# EAGLE board Doppler_LED_Controller-Panel (EAGLE 9.1.3), part 1 of 3
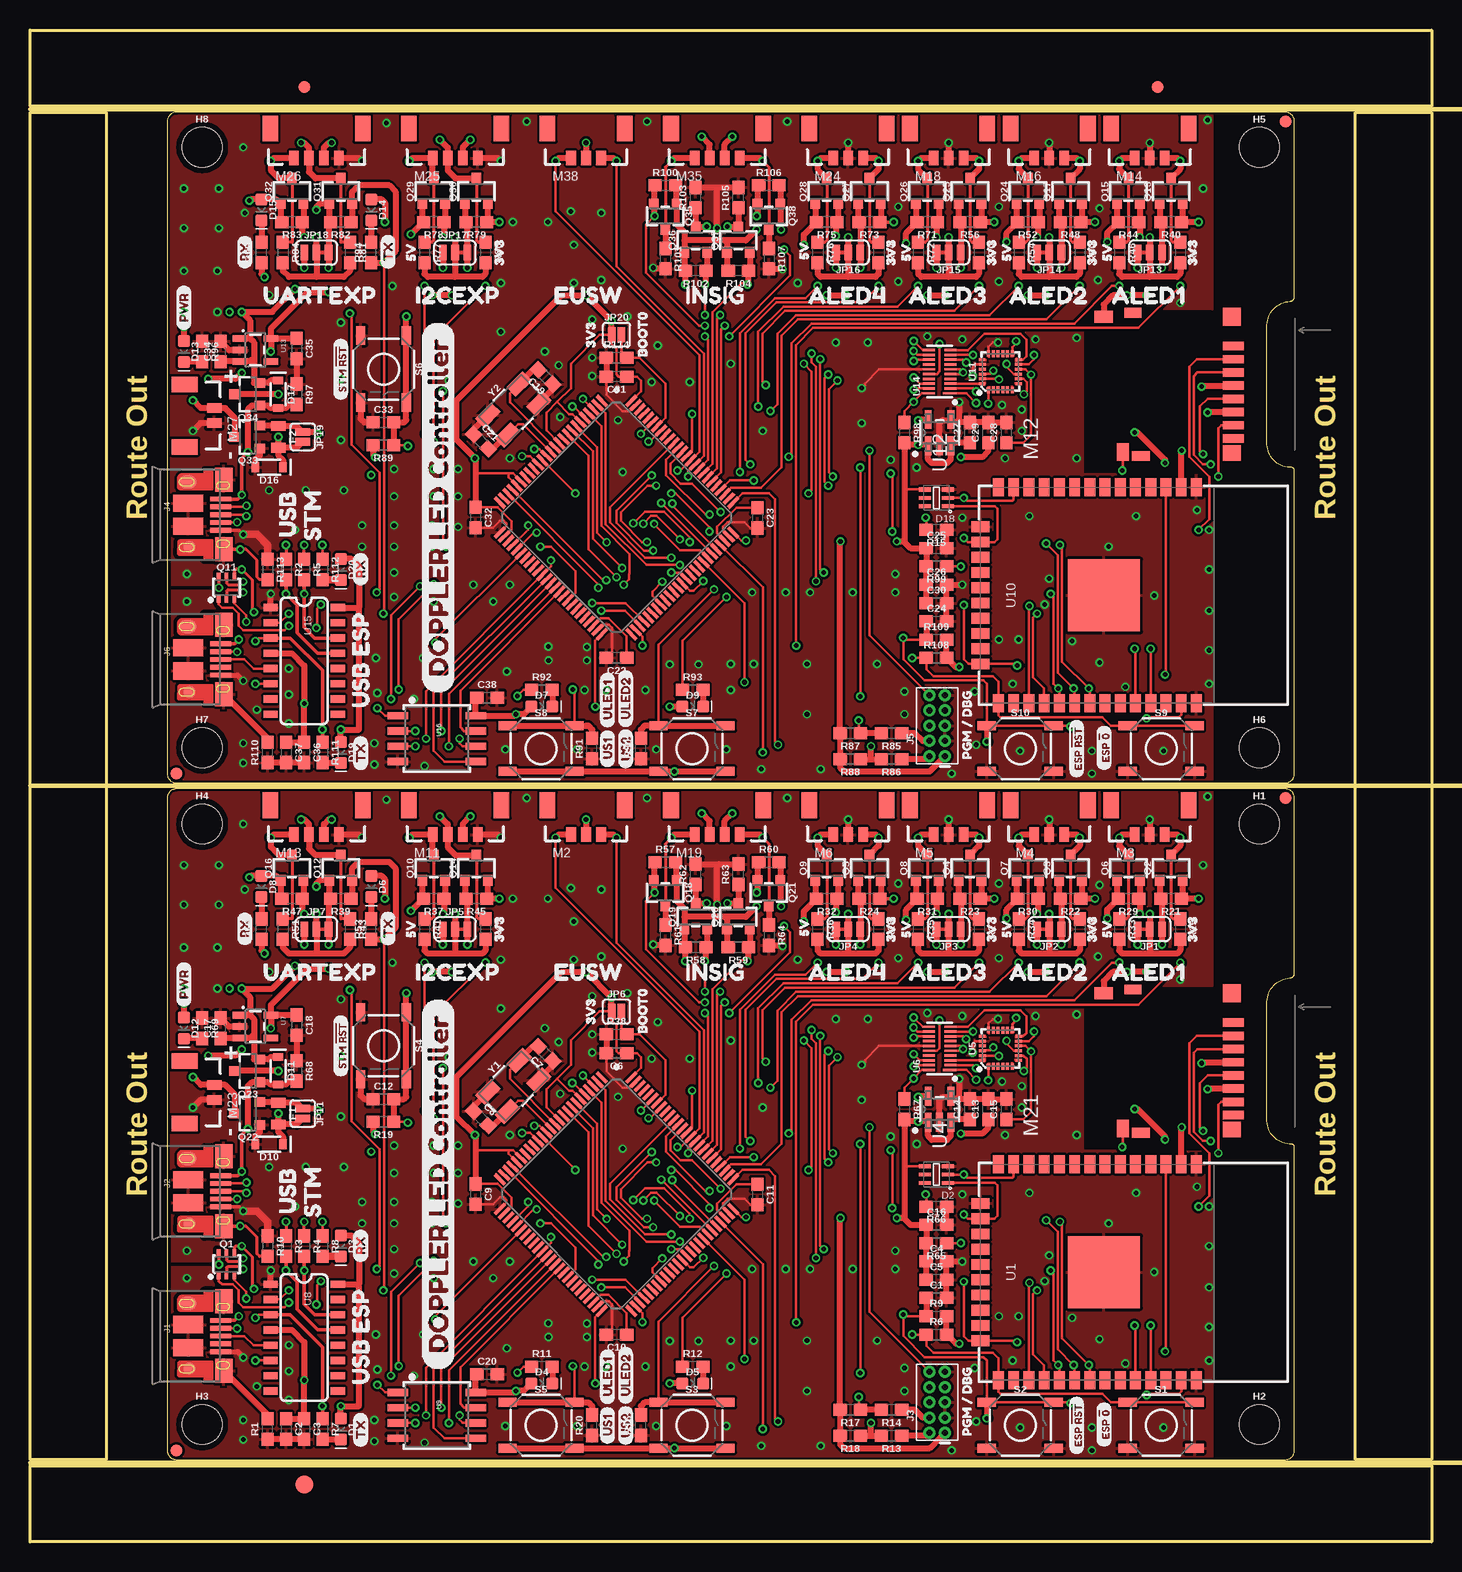
[diagram p0: board, top side]
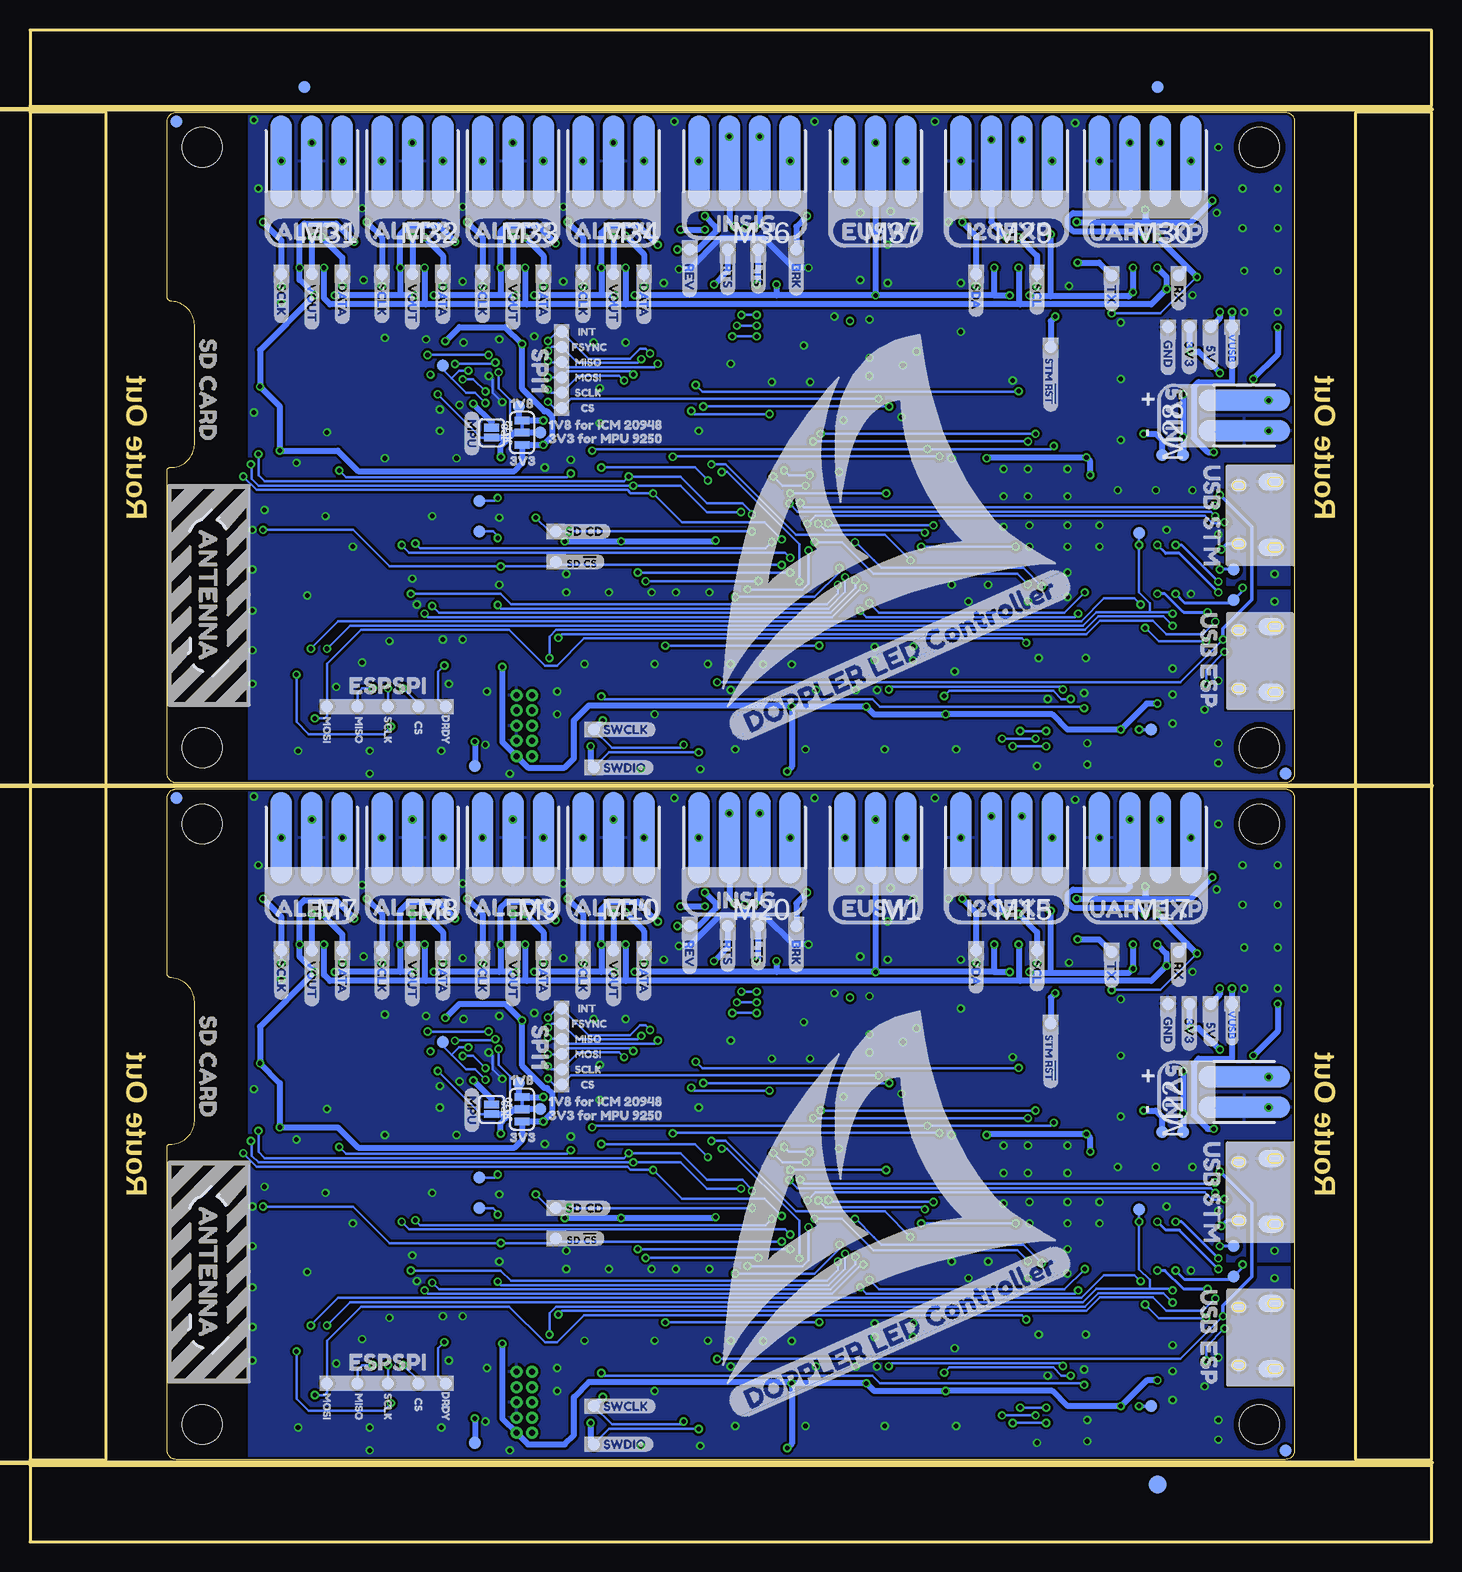
[diagram p1: board, bottom side, seen from below]

Size 116.84 x 125.98 mm. Coordinates in mm from the lower left corner, seen from the top.
Outline: 12.19,6.86 104.65,6.86 arc90 105.41,7.62 105.41,32.89 arc90 105.16,33.15 arc-90 103.12,35.05 103.12,44.83 arc-90 105.03,46.99 arc90 105.41,47.37 105.41,61.98 arc90 104.65,62.74 12.19,62.74 arc90 11.43,61.98 11.43,7.62 arc90 12.19,6.86
Outline: 12.19,63.25 104.65,63.25 arc90 105.41,64.01 105.41,89.28 arc90 105.16,89.54 arc-90 103.12,91.44 103.12,101.22 arc-90 105.03,103.38 arc90 105.41,103.76 105.41,118.36 arc90 104.65,119.13 12.19,119.13 arc90 11.43,118.36 11.43,64.01 arc90 12.19,63.25
Outline: 0,6.35 116.84,6.35 116.84,0 0,0 0,6.35
Outline: 110.49,119.13 116.84,119.13 116.84,6.86 110.49,6.86 110.49,119.13
Outline: 0,125.98 116.84,125.98 116.84,119.63 0,119.63 0,125.98
Outline: 0,119.13 6.35,119.13 6.35,6.86 0,6.86 0,119.13
Copper layers (1*16): Top 0.035mm / dielectric 1.5mm / Bottom 0.035mm
Design rules "SparkFun-2-layer-PCBWay-LIMIT": minimum track width 6mil, minimum drill 0.3mm, track to track 6mil, track to pad 6mil, pad to pad 6mil, via to via 6mil, smd to smd 6mil, copper to edge 6mil, drill to drill 6mil, minimum pad ring 6mil, minimum via ring 6mil, stop-mask expansion 4mil, vias tented up to drill 25mil, thermal gap 10mil
Milling: 3 lines

## Footprints (pad centres in the part's own frame; a part is rotated, then mirrored left to right if it is on the bottom)
0603 = smd 1.1 x 1: 1 -0.85,0; 2 0.85,0
LED-0603 = smd 1 x 1: A -0.877,0; C 0.877,0
APA102_2020_LONG = smd 1 x 0.3: 1DIN -0.95,0.7; 2CIN -0.95,0; 5COUT 0.95,0; 6DOUT 0.95,0.7 | smd 1 x 0.35: 3GND -0.95,-0.7; 4VCC 0.95,-0.7
SOD-323 = smd 0.63 x 0.83: A 1.15,0; C -1.15,0
FIDUCIAL-1X2 = smd 1 x 1: 1 0,0
FIDUCIAL-1.5X3 = smd 1.5 x 1.5: 1 0,0
0805 = smd 0.8 x 1.2: 1 -0.9,0; 2 0.9,0
STAND-OFF = hole 3.302: 0,0
USB-MICROB-PTH-MILL = smd 0.4 x 1.75: D+ 0,0; D- -0.65,0; GND 1.3,0; ID 0.65,0; VBUS -1.3,0 | smd 2 x 1.46: SHIELD -2.9,0.275; SHIELD2 2.9,0.275 | smd 1.425 x 2.5: SHIELD3 -0.963,-2.675; SHIELD4 0.963,-2.675 | smd 1.4 x 2.1 bottom: SHIELD5 -2.731,-2.531; SHIELD7 2.729,-2.531 | smd 1 x 1: SHIELD6 2.7,-2.575 | smd 1.1 x 1.5: SHIELD8 -2.731,-2.731 | smd 1 x 1.3 bottom: SHIELD9 -2.43,0.195; SHIELD10 2.43,0.195
2X5-PTH-1.27MM = drill 0.508 pad 1: 1 -2.54,-0.635; 2 -2.54,0.635; 3 -1.27,-0.635; 4 -1.27,0.635; 5 0,-0.635; 6 0,0.635; 7 1.27,-0.635; 8 1.27,0.635; 9 2.54,-0.635; 10 2.54,0.635
SMT-JUMPER_3_1-NC_TRACE_SILK = smd 0.635 x 1.27: 1 -1.016,0; 2 0,0; 3 1.016,0
SMT-JUMPER_2_NO_SILK = smd 0.635 x 1.27: 1 -0.406,0; 2 0.406,0
1X03_SMD_0.1IN = smd 1.778 x 7.62: P$1 -2.54,0; P$2 0,0; P$3 2.54,0
3_PIN_LOCK = smd 1.3 x 2.15: MOUNT0 -3.225,2.46; MOUNT1 3.225,2.46 | smd 0.8 x 1.2: P$1 -1.25,0; P$2 0,0; P$3 1.25,0
4_PIN_LOCK = smd 1.3 x 2.15: MOUNT0 -4.475,2.46; MOUNT1 3.225,2.46 | smd 0.8 x 1.2: P$1 -2.5,0; P$2 -1.25,0; P$3 0,0; P$4 1.25,0
SD_AMPHENOL_PUSH_PULL = smd 1.45 x 1: CD_SW1 -1.125,8.35 | smd 1 x 1.55: CD_SW2 10.15,9.925 | smd 1.3 x 1.5: NC_MOUNT1 -1.2,-0.75 | smd 1.5 x 1.5: NC_MOUNT2 10.15,-0.75 | smd 0.8 x 1.5: NC_MOUNT3 -1.475,6.85 | smd 0.8 x 1.4: NC_MOUNT4 10.475,7.5 | smd 0.7 x 1.75: P$1 7.7,-0.875; P$2 6.6,-0.875; P$3 5.5,-0.875; P$4 4.4,-0.875; P$5 3.3,-0.875; P$6 2.2,-0.875; P$7 1.1,-0.875; P$8 0,-0.875
1X04_SMD_0.1IN = smd 1.778 x 7.62: P$1 -3.81,0; P$2 -1.27,0; P$3 1.27,0; P$4 3.81,0
1X02_SMD_0.1IN = smd 1.778 x 7.62: P$1 -1.27,0; P$2 1.27,0
2_PIN_LOCK = smd 1.3 x 2.15: MOUNT0 -1.975,2.46; MOUNT1 3.225,2.46 | smd 0.8 x 1.2: P$2 0,0; P$3 1.25,0
SC70-6 = smd 0.3 x 0.66: 1 -0.65,-0.92; 2 0,-0.92; 3 0.65,-0.92; 4 0.65,0.92; 5 0,0.92; 6 -0.65,0.92
SOT23-3 = smd 0.8 x 0.9: 1 -0.95,-1; 2 0.95,-1; 3 0,1.1
TACTILE_SWITCH_SMD_5.2MM = smd 1.524 x 0.762: 1 -2.794,1.905; 2 2.794,1.905; 3 -2.794,-1.905; 4 2.794,-1.905
PAD.03X.04 = smd 1.016 x 1.016: P$1 0,0
ESP-WROOM-32 = smd 0.9 x 1.5: 1 7.7,9; 2 6.43,9; 3 5.16,9; 4 3.89,9; 5 2.62,9; 6 1.35,9; 7 0.08,9; 8 -1.19,9; 9 -2.46,9; 10 -3.73,9; 11 -5,9; 12 -6.27,9; 13 -7.54,9; 14 -8.81,9; 25 -8.81,-9; 26 -7.54,-9; 27 -6.27,-9; 28 -5,-9; 29 -3.73,-9; 30 -2.46,-9; 31 -1.19,-9; 32 0.08,-9; 33 1.35,-9; 34 2.62,-9; 35 3.89,-9; 36 5.16,-9; 37 6.43,-9; 38 7.7,-9 | smd 1.5 x 0.9: 15 -10.3,5.715; 16 -10.3,4.445; 17 -10.3,3.175; 18 -10.3,1.905; 19 -10.3,0.635; 20 -10.3,-0.635; 21 -10.3,-1.905; 22 -10.3,-3.175; 23 -10.3,-4.445; 24 -10.3,-5.715 | smd 6 x 6: GND 0,0
LQFP-100 = smd 0.3 x 1.2: P$1 -6,-7.75; P$2 -5.5,-7.75; P$3 -5,-7.75; P$4 -4.5,-7.75; P$5 -4,-7.75; P$6 -3.5,-7.75; P$7 -3,-7.75; P$8 -2.5,-7.75; P$9 -2,-7.75; P$10 -1.5,-7.75; P$11 -1,-7.75; P$12 -0.5,-7.75; P$13 0,-7.75; P$14 0.5,-7.75; P$15 1,-7.75; P$16 1.5,-7.75; P$17 2,-7.75; P$18 2.5,-7.75; P$19 3,-7.75; P$20 3.5,-7.75; P$21 4,-7.75; P$22 4.5,-7.75; P$23 5,-7.75; P$24 5.5,-7.75; P$25 6,-7.75; P$51 6,7.75; P$52 5.5,7.75; P$53 5,7.75; P$54 4.5,7.75; P$55 4,7.75; P$56 3.5,7.75; P$57 3,7.75; P$58 2.5,7.75; P$59 2,7.75; P$60 1.5,7.75; P$61 1,7.75; P$62 0.5,7.75; P$63 0,7.75; P$64 -0.5,7.75; P$65 -1,7.75; P$66 -1.5,7.75; P$67 -2,7.75; P$68 -2.5,7.75; P$69 -3,7.75; P$70 -3.5,7.75; P$71 -4,7.75; P$72 -4.5,7.75; P$73 -5,7.75; P$74 -5.5,7.75; P$75 -6,7.75 | smd 1.2 x 0.3: P$26 7.75,-6; P$27 7.75,-5.5; P$28 7.75,-5; P$29 7.75,-4.5; P$30 7.75,-4; P$31 7.75,-3.5; P$32 7.75,-3; P$33 7.75,-2.5; P$34 7.75,-2; P$35 7.75,-1.5; P$36 7.75,-1; P$37 7.75,-0.5; P$38 7.75,0; P$39 7.75,0.5; P$40 7.75,1; P$41 7.75,1.5; P$42 7.75,2; P$43 7.75,2.5; P$44 7.75,3; P$45 7.75,3.5; P$46 7.75,4; P$47 7.75,4.5; P$48 7.75,5; P$49 7.75,5.5; P$50 7.75,6; P$76 -7.75,6; P$77 -7.75,5.5; P$78 -7.75,5; P$79 -7.75,4.5; P$80 -7.75,4; P$81 -7.75,3.5; P$82 -7.75,3; P$83 -7.75,2.5; P$84 -7.75,2; P$85 -7.75,1.5; P$86 -7.75,1; P$87 -7.75,0.5; P$88 -7.75,0; P$89 -7.75,-0.5; P$90 -7.75,-1; P$91 -7.75,-1.5; P$92 -7.75,-2; P$93 -7.75,-2.5; P$94 -7.75,-3; P$95 -7.75,-3.5; P$96 -7.75,-4; P$97 -7.75,-4.5; P$98 -7.75,-5; P$99 -7.75,-5.5; P$100 -7.75,-6
DDC5 = smd 1.575 x 0.559: 1 -1.092,0.95; 2 -1.092,0; 3 -1.092,-0.95; 4 1.092,-0.95; 5 1.092,0.95
QFN24-3X3 = smd 0.495 x 0.25: 1 -1.552,1; 6 -1.552,-1; 13 1.552,-1; 18 1.552,1 | smd 0.6 x 0.25: 2 -1.5,0.6; 3 -1.5,0.2; 4 -1.5,-0.2; 5 -1.5,-0.6; 14 1.5,-0.6; 15 1.5,-0.2; 16 1.5,0.2; 17 1.5,0.6 | smd 0.25 x 0.495: 7 -1,-1.552; 12 1,-1.552; 19 1,1.552; 24 -1,1.552 | smd 0.25 x 0.6: 8 -0.6,-1.5; 9 -0.2,-1.5; 10 0.2,-1.5; 11 0.6,-1.5; 20 0.6,1.5; 21 0.2,1.5; 22 -0.2,1.5; 23 -0.6,1.5
UFDFN-20 = smd 0.2 x 1.1: 1 -1.8,-0.85 | smd 0.2 x 1: 2 -1.4,-0.9; 3 -1,-0.9; 4 -0.6,-0.9; 5 -0.2,-0.9; 6 0.2,-0.9; 7 0.6,-0.9; 8 1,-0.9; 9 1.4,-0.9; 10 1.8,-0.9; 11 1.8,0.9; 12 1.4,0.9; 13 1,0.9; 14 0.6,0.9; 15 0.2,0.9; 16 -0.2,0.9; 17 -0.6,0.9; 18 -1,0.9; 19 -1.4,0.9; 20 -1.8,0.9
SOT23-5 = smd 0.55 x 1.2: 1 -0.95,-1.3; 2 0,-1.3; 3 0.95,-1.3; 4 0.95,1.3; 5 -0.95,1.3
SO016 = smd 0.6 x 1.2: 1 -4.445,-2.8; 2 -3.175,-2.8; 3 -1.905,-2.8; 4 -0.635,-2.8; 5 0.635,-2.8; 6 1.905,-2.8; 7 3.175,-2.8; 8 4.445,-2.8; 9 4.445,2.8; 10 3.175,2.8; 11 1.905,2.8; 12 0.635,2.8; 13 -0.635,2.8; 14 -1.905,2.8; 15 -3.175,2.8; 16 -4.445,2.8
SOIC-8 = smd 0.61 x 1.702: 1 -1.905,-3.251; 2 -0.635,-3.251; 3 0.635,-3.251; 4 1.905,-3.251; 5 1.905,3.251; 6 0.635,3.251; 7 -0.635,3.251; 8 -1.905,3.251
CRYSTAL-SMD-5X3.2-4PAD = smd 1.9 x 1.1: 1 -1.85,-1.15; 2 1.85,-1.15; 3 1.85,1.15; 4 -1.85,1.15

## Placement (x,y rotation side)
C1  0.1uF  [0603]  75.56,20.32 0 top
C2  2.2uF  [0603]  21.34,9.4 270 top
C3  0.1uF  [0603]  22.86,9.4 270 top
C4  0.1uF  [0603]  75.56,23.37 0 top
C5  10uF  [0603]  75.56,21.84 0 top
C6  0.1uF  [0603]  48.9,40.72 180 top
C7  18pF  [0603]  42.98,40.68 135 top
C8  18pF  [0603]  37.59,35.29 315 top
C9  10uF  [0603]  37.15,28.97 270 top
C10  2.2uF  [0603]  48.9,17.27 180 top
C11  2.2uF  [0603]  60.64,28.94 270 top
C12  0.1uF  [0603]  29.46,36.89 0 top
C13  0.1uF  [0603]  79.88,36.04 90 top
C14  0.1uF  [0603]  78.36,36.04 90 top
C15  0.1uF  [0603]  81.41,36.04 90 top
C16  0.1uF  [0603]  75.56,26.42 0 top
C17  2.2uF  [0603]  15.88,42.8 90 top
C18  2.2uF  [0603]  22.23,43.05 270 top
C19  18pF  [0603]  42.98,97.07 135 top
C20  0.1uF  [0603]  38.1,13.97 0 top
C21  18pF  [0603]  37.59,91.68 315 top
C22  2.2uF  [0603]  48.9,73.66 180 top
C23  2.2uF  [0603]  60.64,85.33 270 top
C24  0.1uF  [0603]  75.56,76.71 0 top
C25  0.1uF  [0603]  75.56,82.8 0 top
C26  0.1uF  [0603]  75.56,79.76 0 top
C27  0.1uF  [0603]  78.36,92.43 90 top
C28  0.1uF  [0603]  81.41,92.43 90 top
C29  0.1uF  [0603]  79.88,92.43 90 top
C30  10uF  [0603]  75.56,78.23 0 top
C31  0.1uF  [0603]  48.9,97.1 180 top
C32  10uF  [0603]  37.15,85.36 270 top
C33  0.1uF  [0603]  29.46,93.28 0 top
C34  2.2uF  [0603]  15.88,99.19 90 top
C35  2.2uF  [0603]  22.23,99.44 270 top
C36  0.1uF  [0603]  22.86,65.79 270 top
C37  2.2uF  [0603]  21.34,65.79 270 top
C38  0.1uF  [0603]  38.1,70.36 0 top
D1  ESPTX-GREEN  [LED-0603]  25.91,9.4 270 top
D2  ESP_STAT  [APA102_2020_LONG]  75.56,30.61 180 top
D3  ESPRX-YELLOW  [LED-0603]  25.91,24.64 270 top
D4  ULED1-BLUE  [LED-0603]  42.67,13.21 0 top
D5  ULED2-WHITE  [LED-0603]  55.24,13.21 0 top
D6  U7TX-GREEN  [LED-0603]  28.45,54.61 270 top
D7  ULED1-BLUE  [LED-0603]  42.67,69.6 0 top
D8  U7RX-YELLOW  [LED-0603]  19.3,54.61 270 top
D9  ULED2-WHITE  [LED-0603]  55.24,69.6 0 top
D10  5.6V  [SOD-323]  19.94,33.15 180 top
D11  3A/10V/280mV  [SOD-323]  20.7,39.24 270 top
D12  PWR-RED  [LED-0603]  12.83,42.8 270 top
D13  PWR-RED  [LED-0603]  12.83,99.19 270 top
D14  U7TX-GREEN  [LED-0603]  28.45,111 270 top
D15  U7RX-YELLOW  [LED-0603]  19.3,111 270 top
D16  5.6V  [SOD-323]  19.94,89.54 180 top
D17  3A/10V/280mV  [SOD-323]  20.7,95.63 270 top
D18  ESP_STAT  [APA102_2020_LONG]  75.56,87 180 top
D19  ESPTX-GREEN  [LED-0603]  25.91,65.79 270 top
D20  ESPRX-YELLOW  [LED-0603]  25.91,81.03 270 top
E$1  [FIDUCIAL-1X2]  22.86,121.22 0 top
E$2  [FIDUCIAL-1X2]  22.86,121.22 0 bottom
E$3  [FIDUCIAL-1X2]  93.98,121.22 0 top
E$4  [FIDUCIAL-1X2]  93.98,121.22 0 bottom
E$5  [FIDUCIAL-1.5X3]  22.86,4.76 0 top
E$6  [FIDUCIAL-1.5X3]  22.86,4.76 0 bottom
F1  PPTC_6V500MA  [0805]  20.7,35.69 270 top
F2  PPTC_6V500MA  [0805]  20.7,92.08 270 top
FD1  FIDUCIAL1X2  [FIDUCIAL-1X2]  12.19,7.62 0 top
FD2  FIDUCIAL1X2  [FIDUCIAL-1X2]  104.65,61.98 0 top
FD3  FIDUCIAL1X2  [FIDUCIAL-1X2]  12.19,7.62 0 bottom
FD4  FIDUCIAL1X2  [FIDUCIAL-1X2]  104.65,61.98 0 bottom
FD5  FIDUCIAL1X2  [FIDUCIAL-1X2]  12.19,64.01 0 top
FD6  FIDUCIAL1X2  [FIDUCIAL-1X2]  104.65,118.36 0 top
FD7  FIDUCIAL1X2  [FIDUCIAL-1X2]  12.19,64.01 0 bottom
FD8  FIDUCIAL1X2  [FIDUCIAL-1X2]  104.65,118.36 0 bottom
H1  STAND-OFF  [STAND-OFF]  102.49,59.82 0 top
H2  STAND-OFF  [STAND-OFF]  102.49,9.78 0 top
H3  STAND-OFF  [STAND-OFF]  14.35,9.78 0 top
H4  STAND-OFF  [STAND-OFF]  14.35,59.82 0 top
H5  STAND-OFF  [STAND-OFF]  102.49,116.2 0 top
H6  STAND-OFF  [STAND-OFF]  102.49,66.17 0 top
H7  STAND-OFF  [STAND-OFF]  14.35,66.17 0 top
H8  STAND-OFF  [STAND-OFF]  14.35,116.2 0 top
J1  [USB-MICROB-PTH-MILL]  15.88,17.14 270 top
J2  [USB-MICROB-PTH-MILL]  15.88,29.21 270 top
J3  CORTEX_DEBUG_PTH  [2X5-PTH-1.27MM]  75.63,11.62 90 top
J4  [USB-MICROB-PTH-MILL]  15.88,85.6 270 top
J5  CORTEX_DEBUG_PTH  [2X5-PTH-1.27MM]  75.63,68.01 90 top
J6  [USB-MICROB-PTH-MILL]  15.88,73.53 270 top
JP1  ALED1_VOUT_SEL  [SMT-JUMPER_3_1-NC_TRACE_SILK]  93.34,51.05 180 top
JP2  ALED2_VOUT_SEL  [SMT-JUMPER_3_1-NC_TRACE_SILK]  84.96,51.05 180 top
JP3  ALED3_VOUT_SEL  [SMT-JUMPER_3_1-NC_TRACE_SILK]  76.58,51.05 180 top
JP4  ALED4_VOUT_SEL  [SMT-JUMPER_3_1-NC_TRACE_SILK]  68.2,51.05 180 top
JP5  I2C1_VOUT_SEL  [SMT-JUMPER_3_1-NC_TRACE_SILK]  35.43,51.05 0 top
JP6  JUMPER-SMT_2_NO_SILK  [SMT-JUMPER_2_NO_SILK]  48.9,44.2 0 top
JP7  I2C1_VOUT_SEL  [SMT-JUMPER_3_1-NC_TRACE_SILK]  23.88,51.05 0 top
JP8  IMU_VSEL  [SMT-JUMPER_3_1-NC_TRACE_SILK]  75.82,92.43 90 bottom
JP9  IMU_VSEL  [SMT-JUMPER_3_1-NC_TRACE_SILK]  75.82,36.04 90 bottom
JP10  MPU9250  [SMT-JUMPER_2_NO_SILK]  78.36,36.04 270 bottom
JP11  DEFUSE  [SMT-JUMPER_2_NO_SILK]  22.73,35.69 270 top
JP12  MPU9250  [SMT-JUMPER_2_NO_SILK]  78.36,92.43 270 bottom
JP13  ALED1_VOUT_SEL  [SMT-JUMPER_3_1-NC_TRACE_SILK]  93.34,107.44 180 top
JP14  ALED2_VOUT_SEL  [SMT-JUMPER_3_1-NC_TRACE_SILK]  84.96,107.44 180 top
JP15  ALED3_VOUT_SEL  [SMT-JUMPER_3_1-NC_TRACE_SILK]  76.58,107.44 180 top
JP16  ALED4_VOUT_SEL  [SMT-JUMPER_3_1-NC_TRACE_SILK]  68.2,107.44 180 top
JP17  I2C1_VOUT_SEL  [SMT-JUMPER_3_1-NC_TRACE_SILK]  35.43,107.44 0 top
JP18  I2C1_VOUT_SEL  [SMT-JUMPER_3_1-NC_TRACE_SILK]  23.88,107.44 0 top
JP19  DEFUSE  [SMT-JUMPER_2_NO_SILK]  22.73,92.08 270 top
JP20  JUMPER-SMT_2_NO_SILK  [SMT-JUMPER_2_NO_SILK]  48.9,100.58 0 top
M1  EXT_SWTCH  [1X03_SMD_0.1IN]  46.35,58.67 180 bottom
M2  EXT_SWTCH  [3_PIN_LOCK]  46.35,58.93 0 top
M3  ALED1_LOCK  [3_PIN_LOCK]  93.34,58.93 0 top
M4  ALED2_LOCK  [3_PIN_LOCK]  84.96,58.93 0 top
M5  ALED3_LOCK  [3_PIN_LOCK]  76.58,58.93 0 top
M6  ALED4_LOCK  [3_PIN_LOCK]  68.2,58.93 0 top
M7  ALED1_SMD  [1X03_SMD_0.1IN]  93.34,58.67 180 bottom
M8  ALED2_SMD  [1X03_SMD_0.1IN]  84.96,58.67 180 bottom
M9  ALED3_SMD  [1X03_SMD_0.1IN]  76.58,58.67 180 bottom
M10  ALED4_SMD  [1X03_SMD_0.1IN]  68.2,58.67 180 bottom
M11  I2C1_LOCK  [4_PIN_LOCK]  36.07,58.93 0 top
M12  SD  [SD_AMPHENOL_PUSH_PULL]  99.44,91.95 90 top
M13  U7_LOCK  [4_PIN_LOCK]  24.51,58.93 0 top
M14  ALED1_LOCK  [3_PIN_LOCK]  93.34,115.32 0 top
M15  I2C1_SMD  [1X04_SMD_0.1IN]  35.43,58.67 180 bottom
M16  ALED2_LOCK  [3_PIN_LOCK]  84.96,115.32 0 top
M17  U7_SMD  [1X04_SMD_0.1IN]  23.88,58.67 180 bottom
M18  ALED3_LOCK  [3_PIN_LOCK]  76.58,115.32 0 top
M19  SIG_IN_LOCK  [4_PIN_LOCK]  57.91,58.93 0 top
M20  SIG_IN_SMD  [1X04_SMD_0.1IN]  57.28,58.67 180 bottom
M21  SD  [SD_AMPHENOL_PUSH_PULL]  99.44,35.56 90 top
M22  [1X02_SMD_0.1IN]  15.62,37.46 90 bottom
M23  [2_PIN_LOCK]  15.37,36.83 90 top
M24  ALED4_LOCK  [3_PIN_LOCK]  68.2,115.32 0 top
M25  I2C1_LOCK  [4_PIN_LOCK]  36.07,115.32 0 top
M26  U7_LOCK  [4_PIN_LOCK]  24.51,115.32 0 top
M27  [2_PIN_LOCK]  15.37,93.22 90 top
M28  [1X02_SMD_0.1IN]  15.62,93.85 90 bottom
M29  I2C1_SMD  [1X04_SMD_0.1IN]  35.43,115.06 180 bottom
M30  U7_SMD  [1X04_SMD_0.1IN]  23.88,115.06 180 bottom
M31  ALED1_SMD  [1X03_SMD_0.1IN]  93.34,115.06 180 bottom
M32  ALED2_SMD  [1X03_SMD_0.1IN]  84.96,115.06 180 bottom
M33  ALED3_SMD  [1X03_SMD_0.1IN]  76.58,115.06 180 bottom
M34  ALED4_SMD  [1X03_SMD_0.1IN]  68.2,115.06 180 bottom
M35  SIG_IN_LOCK  [4_PIN_LOCK]  57.91,115.32 0 top
M36  SIG_IN_SMD  [1X04_SMD_0.1IN]  57.28,115.06 180 bottom
M37  EXT_SWTCH  [1X03_SMD_0.1IN]  46.35,115.06 180 bottom
M38  EXT_SWTCH  [3_PIN_LOCK]  46.35,115.32 0 top
Q1  [SC70-6]  16.38,23.11 0 top
Q2  [SOT23-3]  95.12,56.13 0 top
Q3  [SOT23-3]  86.74,56.13 0 top
Q4  [SOT23-3]  78.36,56.13 0 top
Q5  [SOT23-3]  69.98,56.13 0 top
Q6  [SOT23-3]  91.57,56.13 0 top
Q7  [SOT23-3]  83.19,56.13 0 top
Q8  [SOT23-3]  74.8,56.13 0 top
Q9  [SOT23-3]  66.42,56.13 0 top
Q10  [SOT23-3]  33.66,56.13 0 top
Q11  [SC70-6]  16.38,79.5 0 top
Q12  [SOT23-3]  25.91,56.13 0 top
Q13  [SOT23-3]  95.12,112.52 0 top
Q14  [SOT23-3]  37.21,56.13 0 top
Q15  [SOT23-3]  91.57,112.52 0 top
Q16  [SOT23-3]  21.84,56.13 0 top
Q17  [SOT23-3]  86.74,112.52 0 top
Q18  [SOT23-3]  52.96,54.1 180 top
Q19  [SOT23-3]  55.5,52.07 0 top
Q20  [SOT23-3]  59.05,52.07 0 top
Q21  [SOT23-3]  61.59,54.1 180 top
Q22  4.3A/20V/54mΩ  [SOT23-3]  18.16,35.69 90 top
Q23  4.3A/20V/54mΩ  [SOT23-3]  18.16,39.24 90 top
Q24  [SOT23-3]  83.19,112.52 0 top
Q25  [SOT23-3]  78.36,112.52 0 top
Q26  [SOT23-3]  74.8,112.52 0 top
Q27  [SOT23-3]  69.98,112.52 0 top
Q28  [SOT23-3]  66.42,112.52 0 top
Q29  [SOT23-3]  33.66,112.52 0 top
Q30  [SOT23-3]  37.21,112.52 0 top
Q31  [SOT23-3]  25.91,112.52 0 top
Q32  [SOT23-3]  21.84,112.52 0 top
Q33  4.3A/20V/54mΩ  [SOT23-3]  18.16,92.08 90 top
Q34  4.3A/20V/54mΩ  [SOT23-3]  18.16,95.63 90 top
Q35  [SOT23-3]  52.96,110.49 180 top
Q36  [SOT23-3]  55.5,108.46 0 top
Q37  [SOT23-3]  59.05,108.46 0 top
Q38  [SOT23-3]  61.59,110.49 180 top
R1  DNP  [0603]  19.81,9.4 90 top
R2  10k  [0603]  21.34,81.03 270 top
R3  10k  [0603]  21.34,24.64 270 top
R4  10k  [0603]  22.86,24.64 270 top
R5  10k  [0603]  22.86,81.03 270 top
R6  10k  [0603]  75.56,17.27 0 top
R7  1k  [0603]  24.38,9.4 270 top
R8  1k  [0603]  24.38,24.64 270 top
R9  10k  [0603]  75.56,18.8 0 top
R10  DNP  [0603]  19.81,24.64 270 top
R11  1k  [0603]  42.67,14.61 0 top
R12  1k  [0603]  55.24,14.61 0 top
R13  20  [0603]  71.82,8.83 180 top
R14  20  [0603]  71.82,10.99 180 top
R15  10k  [0603]  75.56,84.33 180 top
R16  10k  [0603]  50.93,9.72 90 top
R17  10k  [0603]  68.39,10.99 180 top
R18  10k  [0603]  68.39,8.83 180 top
R19  10k  [0603]  29.46,34.99 180 top
R20  10k  [0603]  46.86,9.72 90 top
R21  10k  [0603]  95.12,53.59 180 top
R22  10k  [0603]  86.74,53.59 180 top
R23  10k  [0603]  78.36,53.59 180 top
R24  10k  [0603]  69.98,53.59 180 top
R25  10k  [0603]  95.88,51.05 270 top
R26  10k  [0603]  87.5,51.05 270 top
R27  10k  [0603]  79.12,51.05 270 top
R28  10k  [0603]  70.74,51.05 270 top
R29  10k  [0603]  91.57,53.59 180 top
R30  10k  [0603]  83.19,53.59 180 top
R31  10k  [0603]  74.8,53.59 180 top
R32  10k  [0603]  66.42,53.59 180 top
R33  10k  [0603]  90.81,51.05 270 top
R34  10k  [0603]  82.42,51.05 270 top
R35  10k  [0603]  74.04,51.05 270 top
R36  10k  [0603]  65.66,51.05 270 top
R37  2.2k  [0603]  33.66,53.59 180 top
R38  10k  [0603]  48.9,42.29 0 top
R39  10k  [0603]  25.91,53.59 180 top
R40  10k  [0603]  95.12,109.98 180 top
R41  2.2k  [0603]  32.89,51.05 270 top
R42  10k  [0603]  95.88,107.44 270 top
R43  10k  [0603]  26.67,51.05 270 top
R44  10k  [0603]  91.57,109.98 180 top
R45  2.2k  [0603]  37.21,53.59 180 top
R46  10k  [0603]  90.81,107.44 270 top
R47  10k  [0603]  21.84,53.59 180 top
R48  10k  [0603]  86.74,109.98 180 top
R49  2.2k  [0603]  37.97,51.05 270 top
R50  10k  [0603]  87.5,107.44 270 top
R51  10k  [0603]  21.08,51.05 270 top
R52  10k  [0603]  83.19,109.98 180 top
R53  1k  [0603]  28.45,51.05 90 top
R54  10k  [0603]  82.42,107.44 270 top
R55  1k  [0603]  19.3,51.05 90 top
R56  10k  [0603]  78.36,109.98 180 top
R57  10k  [0603]  52.96,56.64 0 top
R58  10k  [0603]  55.5,49.53 180 top
R59  10k  [0603]  59.05,49.53 180 top
R60  10k  [0603]  61.59,56.64 0 top
R61  10k  [0603]  52.96,50.55 270 top
R62  10k  [0603]  55.5,55.63 90 top
R63  10k  [0603]  59.05,55.63 90 top
R64  10k  [0603]  61.59,50.55 270 top
R65  10k  [0603]  75.56,24.89 180 top
R66  10k  [0603]  75.56,27.94 180 top
R67  10k  [0603]  72.9,36.04 270 top
R68  10k  [0603]  22.23,39.24 270 top
R69  1k  [0603]  14.35,42.8 270 top
R70  10k  [0603]  79.12,107.44 270 top
R71  10k  [0603]  74.8,109.98 180 top
R72  10k  [0603]  74.04,107.44 270 top
R73  10k  [0603]  69.98,109.98 180 top
R74  10k  [0603]  70.74,107.44 270 top
R75  10k  [0603]  66.42,109.98 180 top
R76  10k  [0603]  65.66,107.44 270 top
R77  2.2k  [0603]  32.89,107.44 270 top
R78  2.2k  [0603]  33.66,109.98 180 top
R79  2.2k  [0603]  37.21,109.98 180 top
R80  2.2k  [0603]  37.97,107.44 270 top
R81  10k  [0603]  26.67,107.44 270 top
R82  10k  [0603]  25.91,109.98 180 top
R83  10k  [0603]  21.84,109.98 180 top
R84  10k  [0603]  21.08,107.44 270 top
R85  20  [0603]  71.82,67.37 180 top
R86  20  [0603]  71.82,65.21 180 top
R87  10k  [0603]  68.39,67.37 180 top
R88  10k  [0603]  68.39,65.21 180 top
R89  10k  [0603]  29.46,91.38 180 top
R90  10k  [0603]  50.93,66.1 90 top
R91  10k  [0603]  46.86,66.1 90 top
R92  1k  [0603]  42.67,70.99 0 top
R93  1k  [0603]  55.24,70.99 0 top
R94  1k  [0603]  28.45,107.44 90 top
R95  1k  [0603]  19.3,107.44 90 top
R96  1k  [0603]  14.35,99.19 270 top
R97  10k  [0603]  22.23,95.63 270 top
R98  10k  [0603]  72.9,92.43 270 top
R99  10k  [0603]  75.56,81.28 180 top
R100  10k  [0603]  52.96,113.03 0 top
R101  10k  [0603]  52.96,106.93 270 top
R102  10k  [0603]  55.5,105.92 180 top
R103  10k  [0603]  55.5,112.01 90 top
R104  10k  [0603]  59.05,105.92 180 top
R105  10k  [0603]  59.05,112.01 90 top
R106  10k  [0603]  61.59,113.03 0 top
R107  10k  [0603]  61.59,106.93 270 top
R108  10k  [0603]  75.56,73.66 0 top
R109  10k  [0603]  75.56,75.18 0 top
R110  DNP  [0603]  19.81,65.79 90 top
R111  1k  [0603]  24.38,65.79 270 top
R112  1k  [0603]  24.38,81.03 270 top
R113  DNP  [0603]  19.81,81.03 270 top
R114  10k  [0603]  48.9,98.68 0 top
S1  US2  [TACTILE_SWITCH_SMD_5.2MM]  94.3,9.72 0 top
S2  US2  [TACTILE_SWITCH_SMD_5.2MM]  82.55,9.72 0 top
S3  US2  [TACTILE_SWITCH_SMD_5.2MM]  55.18,9.72 0 top
S4  STM_!RST  [TACTILE_SWITCH_SMD_5.2MM]  29.46,41.34 270 top
S5  US1  [TACTILE_SWITCH_SMD_5.2MM]  42.61,9.72 0 top
S6  STM_!RST  [TACTILE_SWITCH_SMD_5.2MM]  29.46,97.73 270 top
S7  US2  [TACTILE_SWITCH_SMD_5.2MM]  55.18,66.1 0 top
S8  US1  [TACTILE_SWITCH_SMD_5.2MM]  42.61,66.1 0 top
S9  US2  [TACTILE_SWITCH_SMD_5.2MM]  94.3,66.1 0 top
S10  US2  [TACTILE_SWITCH_SMD_5.2MM]  82.55,66.1 0 top
TP1  EDRDY  [PAD.03X.04]  82.17,13.21 0 bottom
TP2  ERX0  [PAD.03X.04]  24.38,84.07 0 bottom
TP3  ERX0  [PAD.03X.04]  24.38,27.69 0 bottom
TP4  ETX0  [PAD.03X.04]  23.37,11.3 0 bottom
TP5  E!RTS  [PAD.03X.04]  16.51,24.64 0 bottom
TP6  E!DTR  [PAD.03X.04]  16.51,22.1 0 bottom
TP7  EMOSI  [PAD.03X.04]  92.07,13.21 0 bottom
TP8  EMISO  [PAD.03X.04]  89.53,13.21 0 bottom
TP9  ESCLK  [PAD.03X.04]  87,13.21 0 bottom
TP10  ECS  [PAD.03X.04]  84.46,13.21 0 bottom
TP11  ESSI  [PAD.03X.04]  79.38,27.81 0 bottom
TP12  ESSCK  [PAD.03X.04]  79.38,30.35 0 bottom
TP13  E!RST  [PAD.03X.04]  79.76,8.25 0 bottom
TP14  ETX0  [PAD.03X.04]  23.37,67.69 0 bottom
TP15  E!RTS  [PAD.03X.04]  16.51,81.03 0 bottom
TP16  E!DTR  [PAD.03X.04]  16.51,78.49 0 bottom
TP17  VDDIO  [PAD.03X.04]  74.3,36.07 0 bottom
TP18  1V8  [PAD.03X.04]  76.07,38.23 0 bottom
TP19  EMOSI  [PAD.03X.04]  92.07,69.6 0 bottom
TP20  S1Si  [PAD.03X.04]  72.52,40.64 0 bottom
TP21  S1SO  [PAD.03X.04]  72.52,41.91 0 bottom
TP22  S1SCLk  [PAD.03X.04]  72.52,39.37 0 bottom
TP23  CSSD  [PAD.03X.04]  73.03,25.27 270 bottom
TP24  CSIMU  [PAD.03X.04]  72.52,38.1 0 bottom
TP25  SDCD  [PAD.03X.04]  73.03,27.81 270 bottom
TP26  EMISO  [PAD.03X.04]  89.53,69.6 0 bottom
TP27  ESCLK  [PAD.03X.04]  87,69.6 0 bottom
TP28  ECS  [PAD.03X.04]  84.46,69.6 0 bottom
TP29  CSIMUIO  [PAD.03X.04]  82.42,41.66 0 bottom
TP30  IMUINT  [PAD.03X.04]  72.52,44.45 0 bottom
TP31  IMUFS  [PAD.03X.04]  72.52,43.18 0 bottom
TP32  ESSI  [PAD.03X.04]  79.38,84.2 0 bottom
TP33  ESSCK  [PAD.03X.04]  79.38,86.74 0 bottom
TP34  AL1D  [PAD.03X.04]  90.81,49.28 0 bottom
TP35  AL2D  [PAD.03X.04]  82.42,49.28 0 bottom
TP36  AL3D  [PAD.03X.04]  74.04,49.28 0 bottom
TP37  AL4D  [PAD.03X.04]  65.66,49.28 0 bottom
TP38  AL1V  [PAD.03X.04]  93.34,49.28 0 bottom
TP39  AL2V  [PAD.03X.04]  84.96,49.28 0 bottom
TP40  AL3V  [PAD.03X.04]  76.58,49.28 0 bottom
TP41  AL4V  [PAD.03X.04]  68.2,49.28 0 bottom
TP42  AL1C  [PAD.03X.04]  95.88,49.28 0 bottom
TP43  AL2C  [PAD.03X.04]  87.5,49.28 0 bottom
TP44  AL3C  [PAD.03X.04]  79.12,49.28 0 bottom
TP45  AL4C  [PAD.03X.04]  70.74,49.28 0 bottom
TP46  E!RST  [PAD.03X.04]  79.76,64.64 0 bottom
TP47  VRPP  [PAD.03X.04]  22.48,34.16 270 bottom
TP48  VOVP  [PAD.03X.04]  20.7,34.16 270 bottom
TP49  VUSB  [PAD.03X.04]  16.64,44.83 270 bottom
TP50  5V  [PAD.03X.04]  18.41,44.83 270 bottom
TP51  3V3  [PAD.03X.04]  20.19,44.83 270 bottom
TP52  GND  [PAD.03X.04]  21.97,44.83 270 bottom
TP53  IIC1SDA  [PAD.03X.04]  37.97,49.28 0 bottom
TP54  IIC1SCL  [PAD.03X.04]  32.89,49.28 0 bottom
TP55  S1Si  [PAD.03X.04]  72.52,97.03 0 bottom
TP56  S1SO  [PAD.03X.04]  72.52,98.3 0 bottom
TP57  U7TX  [PAD.03X.04]  26.67,49.15 0 bottom
TP58  U7RX  [PAD.03X.04]  21.08,49.15 0 bottom
TP59  S1SCLk  [PAD.03X.04]  72.52,95.76 0 bottom
TP60  CSSD  [PAD.03X.04]  73.03,81.66 270 bottom
TP61  CSIMU  [PAD.03X.04]  72.52,94.49 0 bottom
TP62  STMR  [PAD.03X.04]  31.75,43.18 0 bottom
TP63  VDDIO  [PAD.03X.04]  74.3,92.46 0 bottom
TP64  SDCD  [PAD.03X.04]  73.03,84.2 270 bottom
TP65  CSIMUIO  [PAD.03X.04]  82.42,98.04 0 bottom
TP66  IMUINT  [PAD.03X.04]  72.52,100.84 0 bottom
TP67  IMUFS  [PAD.03X.04]  72.52,99.57 0 bottom
TP68  SWCLK  [PAD.03X.04]  69.85,11.3 0 bottom
TP69  BRK  [PAD.03X.04]  52.96,51.31 0 bottom
TP70  LTS  [PAD.03X.04]  56.13,51.31 0 bottom
TP71  RTS  [PAD.03X.04]  58.67,51.31 0 bottom
TP72  REV  [PAD.03X.04]  61.85,51.31 0 bottom
TP73  1V8  [PAD.03X.04]  76.07,94.62 0 bottom
TP74  VRPP  [PAD.03X.04]  22.48,90.55 270 bottom
TP75  VOVP  [PAD.03X.04]  20.7,90.55 270 bottom
TP76  VUSB  [PAD.03X.04]  16.64,101.22 270 bottom
TP77  5V  [PAD.03X.04]  18.41,101.22 270 bottom
TP78  SWDIO  [PAD.03X.04]  69.85,8.13 0 bottom
TP79  3V3  [PAD.03X.04]  20.19,101.22 270 bottom
TP80  GND  [PAD.03X.04]  21.97,101.22 270 bottom
TP81  AL1D  [PAD.03X.04]  90.81,105.66 0 bottom
TP82  AL1V  [PAD.03X.04]  93.34,105.66 0 bottom
TP83  AL1C  [PAD.03X.04]  95.88,105.66 0 bottom
TP84  AL2D  [PAD.03X.04]  82.42,105.66 0 bottom
TP85  AL2V  [PAD.03X.04]  84.96,105.66 0 bottom
TP86  AL2C  [PAD.03X.04]  87.5,105.66 0 bottom
TP87  AL3D  [PAD.03X.04]  74.04,105.66 0 bottom
TP88  AL3V  [PAD.03X.04]  76.58,105.66 0 bottom
TP89  AL3C  [PAD.03X.04]  79.12,105.66 0 bottom
TP90  AL4D  [PAD.03X.04]  65.66,105.66 0 bottom
TP91  AL4V  [PAD.03X.04]  68.2,105.66 0 bottom
TP92  AL4C  [PAD.03X.04]  70.74,105.66 0 bottom
TP93  BRK  [PAD.03X.04]  52.96,107.7 0 bottom
TP94  LTS  [PAD.03X.04]  56.13,107.7 0 bottom
TP95  RTS  [PAD.03X.04]  58.67,107.7 0 bottom
TP96  REV  [PAD.03X.04]  61.85,107.7 0 bottom
TP97  IIC1SDA  [PAD.03X.04]  37.97,105.66 0 bottom
TP98  IIC1SCL  [PAD.03X.04]  32.89,105.66 0 bottom
TP99  U7TX  [PAD.03X.04]  26.67,105.54 0 bottom
TP100  U7RX  [PAD.03X.04]  21.08,105.54 0 bottom
TP101  STMR  [PAD.03X.04]  31.75,99.57 0 bottom
TP102  SWCLK  [PAD.03X.04]  69.85,67.69 0 bottom
TP103  SWDIO  [PAD.03X.04]  69.85,64.52 0 bottom
TP104  EDRDY  [PAD.03X.04]  82.17,69.6 0 bottom
U1  ESP-WROOM-32  [ESP-WROOM-32]  89.53,22.48 0 top
U2  [LQFP-100]  48.9,85.36 225 top
U3  [LQFP-100]  48.9,28.97 225 top
U4  1.8V  [DDC5]  75.82,36.04 90 top
U5  9DoF IMU  [QFN24-3X3]  80.9,41.12 90 top
U6  TXB0108DQSR  [UFDFN-20]  75.82,41.12 90 top
U7  3.3V  [SOT23-5]  18.8,42.93 270 top
U8  CH340C  [SO016]  22.86,17.02 270 top
U9  W25Q32FVSS  [SOIC-8]  33.91,10.54 270 top
U10  ESP-WROOM-32  [ESP-WROOM-32]  89.53,78.87 0 top
U11  9DoF IMU  [QFN24-3X3]  80.9,97.51 90 top
U12  1.8V  [DDC5]  75.82,92.43 90 top
U13  3.3V  [SOT23-5]  18.8,99.31 270 top
U14  TXB0108DQSR  [UFDFN-20]  75.82,97.51 90 top
U15  CH340C  [SO016]  22.86,73.41 270 top
U16  W25Q32FVSS  [SOIC-8]  33.91,66.93 270 top
U$1  [ALED10]  97.66,52.83 0 bottom
U$2  [ALED21]  89.48,52.91 0 bottom
U$3  [ALED43]  72.75,52.88 0 bottom
U$4  [ALED33]  81.08,52.88 0 bottom
U$5  [INSIG4]  60.91,53.47 0 bottom
U$6  [UARTEXP7]  29.79,52.76 0 bottom
U$7  [I2CEXP6]  40.03,52.83 0 bottom
U$8  [EUSW5]  50.42,52.83 0 bottom
U$9  [SCLK1]  95.88,49.15 270 bottom
U$10  [SCLK1]  87.5,49.15 270 bottom
U$11  [SCLK1]  79.12,49.15 270 bottom
U$12  [SCLK1]  70.74,49.15 270 bottom
U$13  [VOUT2]  93.34,49.15 270 bottom
U$14  [VOUT2]  84.96,49.15 270 bottom
U$15  [VOUT2]  76.58,49.15 270 bottom
U$16  [VOUT2]  68.2,49.15 270 bottom
U$17  [DATA0]  90.81,49.15 270 bottom
U$18  [DATA0]  82.42,49.15 270 bottom
U$19  [DATA0]  74.04,49.15 270 bottom
U$20  [DATA0]  65.66,49.15 270 bottom
U$21  [RTS4]  58.67,50.8 270 bottom
U$22  [LTS3]  56.13,50.93 270 bottom
U$23  [BRK5]  52.96,50.8 270 bottom
U$24  [REV6]  61.85,50.8 270 bottom
U$25  [SCL8]  32.89,49.15 270 bottom
U$26  [SDA7]  37.97,49.15 270 bottom
U$27  [TX9]  26.67,49.02 270 bottom
U$28  [RX10]  21.08,49.02 270 bottom
U$29  [5VIN8]  21.46,41 270 bottom
U$30  [VUSB15]  16.64,44.88 270 bottom
U$31  [5V14]  18.39,43.99 270 bottom
U$32  [3V313]  20.19,44.35 270 bottom
U$33  [GND12]  21.97,44.42 270 bottom
U$34  [SWCLK16]  69.72,11.3 0 bottom
U$35  [SWDIO15]  69.72,8.13 0 bottom
U$36  [SCLK20]  87,12.95 270 bottom
U$37  [CS21]  84.46,12.57 270 bottom
U$38  [MISO18]  89.41,12.95 270 bottom
U$39  [MOSI17]  92.07,12.95 270 bottom
U$40  [DRDY19]  82.17,13.08 270 bottom
U$41  [ESPSPI9]  91.57,14.99 0 bottom
U$42  [ANTENNA10]  101.98,29.34 270 bottom
U$43  [SD_CARD11]  101.98,45.08 270 bottom
U$44  [USB_ESP12]  18.54,22.35 270 bottom
U$45  [USB_STM13]  18.29,34.67 270 bottom
U$46  [MOSI17]  72.01,40.64 0 bottom
U$47  [MISO18]  72.01,41.91 0 bottom
U$48  [SCLK20]  72.01,39.37 0 bottom
U$49  [CS21]  71.5,38.1 0 bottom
U$50  [FSYNC23]  72.26,43.18 0 bottom
U$51  [INT22]  71.75,44.45 0 bottom
U$52  [STM_#RST26]  31.75,43.05 270 bottom
U$53  [SD_#CS24]  72.9,25.27 0 bottom
U$54  [SD_CD27]  72.9,27.81 0 bottom
U$55  [DOPPLER_LED_CONTROLLER0]  58.55,11.18 24 bottom
U$56  [ULED23]  49.66,11.43 90 top
U$57  [ULED12]  48.13,11.43 90 top
U$58  [US10]  48.13,8.13 90 top
U$59  [US21]  49.66,8 90 top
U$60  [ESP_#RST5]  87.25,7.11 90 top
U$61  [ESP_#06]  89.53,7.75 90 top
U$62  [PGM_#_DBG7]  78.1,8.13 90 top
U$63  [TX9]  29.84,49.66 90 top
U$64  [RX10]  17.91,49.66 90 top
U$65  [PWR8]  12.83,44.58 90 top
U$66  [TX9]  27.56,7.87 90 top
U$67  [RX10]  27.56,23.24 90 top
U$68  [DOPPLER_LED_CONTROLLER0]  34.04,14.22 90 top
U$69  [STM_#RST24]  25.91,38.61 90 top
U$70  [ALED10]  97.66,109.22 0 bottom
U$71  [USB_ESP12]  27.56,11.81 90 top
U$72  [3V310]  46.74,42.42 90 top
U$73  [BOOT09]  51.05,41.66 90 top
U$74  [ALED10]  88.9,47.5 0 top
U$75  [ALED21]  80.39,47.5 0 top
U$76  [ALED33]  72.01,47.5 0 top
U$77  [ALED42]  63.63,47.5 0 top
U$78  [INSIG4]  53.34,47.5 0 top
U$79  [UARTEXP7]  18.16,47.5 0 top
U$80  [I2CEXP6]  30.86,47.5 0 top
U$81  [EUSW5]  42.42,47.5 0 top
U$82  [3V310]  39.12,49.28 90 top
U$83  [3V310]  71.75,49.28 90 top
U$84  [3V310]  80.14,49.28 90 top
U$85  [3V310]  88.52,49.28 90 top
U$86  [3V310]  96.9,49.28 90 top
U$87  [5V11]  31.75,49.66 90 top
U$88  [5V11]  64.52,49.78 90 top
U$89  [5V11]  73.03,49.66 90 top
U$90  [5V11]  81.41,49.66 90 top
U$91  [5V11]  89.79,49.66 90 top
U$92  [SPI116]  74.3,44.32 270 bottom
U$93  [3V39]  77.52,33.71 0 bottom
U$94  [1V817]  77.47,38.48 0 bottom
U$95  [1V8_FOR_ICM_2094818]  74.3,36.7 0 bottom
U$96  [3V3_FOR_MPU_925019]  74.3,35.56 0 bottom
U$97  [MPU20]  80.01,37.85 270 bottom
U$98  REV_NUM  [REV_NUM]  98.04,49.91 270 bottom
U$99  [USB0]  21.46,26.04 90 top
U$100  [STM1]  23.53,25.81 90 top
U$101  [ALED21]  89.48,109.3 0 bottom
U$102  [ALED43]  72.75,109.27 0 bottom
U$103  [ALED33]  81.08,109.27 0 bottom
U$104  [INSIG4]  60.91,109.86 0 bottom
U$105  [UARTEXP7]  29.79,109.14 0 bottom
U$106  [I2CEXP6]  40.03,109.22 0 bottom
U$107  [EUSW5]  50.42,109.22 0 bottom
U$108  [SCLK1]  95.88,105.54 270 bottom
U$109  [SCLK1]  87.5,105.54 270 bottom
U$110  [SCLK1]  79.12,105.54 270 bottom
U$111  [SCLK1]  70.74,105.54 270 bottom
U$112  [VOUT2]  93.34,105.54 270 bottom
U$113  [VOUT2]  84.96,105.54 270 bottom
U$114  [VOUT2]  76.58,105.54 270 bottom
U$115  [VOUT2]  68.2,105.54 270 bottom
U$116  [DATA0]  90.81,105.54 270 bottom
U$117  [DATA0]  82.42,105.54 270 bottom
U$118  [DATA0]  74.04,105.54 270 bottom
U$119  [DATA0]  65.66,105.54 270 bottom
U$120  [RTS4]  58.67,107.19 270 bottom
U$121  [LTS3]  56.13,107.31 270 bottom
U$122  [BRK5]  52.96,107.19 270 bottom
U$123  [REV6]  61.85,107.19 270 bottom
U$124  [SCL8]  32.89,105.54 270 bottom
U$125  [SDA7]  37.97,105.54 270 bottom
U$126  [TX9]  26.67,105.41 270 bottom
U$127  [RX10]  21.08,105.41 270 bottom
U$128  [5VIN8]  21.46,97.38 270 bottom
U$129  [SWCLK16]  69.72,67.69 0 bottom
U$130  [SWDIO15]  69.72,64.52 0 bottom
U$131  [SCLK20]  87,69.34 270 bottom
U$132  [CS21]  84.46,68.96 270 bottom
U$133  [MISO18]  89.41,69.34 270 bottom
U$134  [MOSI17]  92.07,69.34 270 bottom
U$135  [DRDY19]  82.17,69.47 270 bottom
U$136  [ESPSPI9]  91.57,71.37 0 bottom
U$137  [ANTENNA10]  101.98,85.73 270 bottom
U$138  [SD_CARD11]  101.98,101.47 270 bottom
U$139  [USB_ESP12]  18.54,78.74 270 bottom
U$140  [USB_STM13]  18.29,91.06 270 bottom
U$141  [MOSI17]  72.01,97.03 0 bottom
U$142  [MISO18]  72.01,98.3 0 bottom
U$143  [SCLK20]  72.01,95.76 0 bottom
U$144  [CS21]  71.5,94.49 0 bottom
U$145  [FSYNC23]  72.26,99.57 0 bottom
U$146  [INT22]  71.75,100.84 0 bottom
U$147  [STM_#RST26]  31.75,99.44 270 bottom
U$148  [SD_#CS24]  72.9,81.66 0 bottom
U$149  [SD_CD27]  72.9,84.2 0 bottom
U$150  [DOPPLER_LED_CONTROLLER0]  58.55,67.56 24 bottom
U$151  [ULED23]  49.66,67.82 90 top
U$152  [ULED12]  48.13,67.82 90 top
U$153  [US10]  48.13,64.52 90 top
U$154  [US21]  49.66,64.39 90 top
U$155  [ESP_#RST5]  87.25,63.5 90 top
U$156  [ESP_#06]  89.53,64.14 90 top
U$157  [PGM_#_DBG7]  78.1,64.52 90 top
U$158  [TX9]  29.84,106.05 90 top
U$159  [RX10]  17.91,106.05 90 top
U$160  [PWR8]  12.83,100.97 90 top
U$161  [TX9]  27.56,64.26 90 top
U$162  [RX10]  27.56,79.63 90 top
U$163  [DOPPLER_LED_CONTROLLER0]  34.04,70.61 90 top
U$164  [STM_#RST24]  25.91,95 90 top
U$165  [USB_ESP12]  27.56,68.2 90 top
U$166  [3V310]  46.74,98.81 90 top
U$167  [BOOT09]  51.05,98.04 90 top
U$168  [ALED10]  88.9,103.89 0 top
U$169  [ALED21]  80.39,103.89 0 top
U$170  [ALED33]  72.01,103.89 0 top
U$171  [ALED42]  63.63,103.89 0 top
U$172  [INSIG4]  53.34,103.89 0 top
U$173  [UARTEXP7]  18.16,103.89 0 top
U$174  [I2CEXP6]  30.86,103.89 0 top
U$175  [EUSW5]  42.42,103.89 0 top
U$176  [3V310]  39.12,105.66 90 top
U$177  [3V310]  71.75,105.66 90 top
U$178  [3V310]  80.14,105.66 90 top
U$179  [3V310]  88.52,105.66 90 top
U$180  [3V310]  96.9,105.66 90 top
U$181  [5V11]  31.75,106.05 90 top
U$182  [5V11]  64.52,106.17 90 top
U$183  [5V11]  73.03,106.05 90 top
U$184  [5V11]  81.41,106.05 90 top
U$185  [5V11]  89.79,106.05 90 top
U$186  [VUSB15]  16.64,101.27 270 bottom
U$187  [5V14]  18.39,100.38 270 bottom
U$188  [3V313]  20.19,100.74 270 bottom
U$189  [GND12]  21.97,100.81 270 bottom
U$190  [SPI116]  74.3,100.71 270 bottom
U$191  [3V39]  77.52,90.09 0 bottom
U$192  [1V817]  77.47,94.87 0 bottom
U$193  [1V8_FOR_ICM_2094818]  74.3,93.09 0 bottom
U$194  [3V3_FOR_MPU_925019]  74.3,91.95 0 bottom
U$195  [MPU20]  80.01,94.23 270 bottom
U$196  REV_NUM  [REV_NUM]  98.04,106.3 270 bottom
U$197  [USB0]  21.46,82.42 90 top
U$198  [STM1]  23.53,82.19 90 top
Y1  24MHz  [CRYSTAL-SMD-5X3.2-4PAD]  40.29,37.98 45 top
Y2  24MHz  [CRYSTAL-SMD-5X3.2-4PAD]  40.29,94.37 45 top

## Library data of the parts
C1 C3 C4 C6 C12-C16 C24-C29 C31 C33 C36 = SparkFun-Capacitors; PROD_ID: CAP-08604
C2 C10 C11 C17 C18 C22 C23 C34 C35 C37 = SparkFun-Capacitors; PROD_ID: CAP-07888
C5 C9 C30 C32 = SparkFun-Capacitors; PROD_ID: CAP-11015
C7 C8 C19 C21 = SparkFun-Capacitors; PROD_ID: CAP-08267
C20 C38 = SparkFun-Capacitors; PROD_ID: CAP-00810
D1 D6 D14 D19 = SparkFun-LED; PROD_ID: DIO-00821
D2 D18 M1-M38 Q2-Q10 Q12-Q21 Q24-Q32 Q35-Q38 U2 U3 Y1 Y2 = MTAES_V2_UniqueParts
D3 D8 D15 D20 = SparkFun-LED; PROD_ID: DIO-09003
D4 D7 = SparkFun-LED; PROD_ID: DIO-08575
D5 D9 = SparkFun-LED; PROD_ID: DIO-09004
D10 D16 = SparkFun-DiscreteSemi; PROD_ID: DIO-12442
D11 D17 = SparkFun-DiscreteSemi; PROD_ID: DIO-14072
D12 D13 = SparkFun-LED; PROD_ID: DIO-00819
E$1-E$4 FD1-FD8 = SparkFun-Aesthetics
E$5 E$6 = SparkFun-Retired
F1 F2 = SparkFun-Fuses
H1-H8 = SparkFun-Hardware
J1 J2 J4 J6 = SparkFun-Connectors; PROD_ID: CONN-13711
J3 J5 TP1-TP104 = SparkFun-Connectors
JP1-JP20 = SparkFun-Jumpers
Q1 Q11 = SparkFun-DiscreteSemi; PROD_ID: TRANS-13337
Q22 Q23 Q33 Q34 = SparkFun-DiscreteSemi; PROD_ID: TRANS-11153
R1 R10 R110 R113 = SparkFun-Resistors; PROD_ID: RES-07868
R2-R6 R9 R15-R36 R38-R40 R42-R44 R46-R48 R50-R52 R54 R56-R68 R70-R76 R81-R84 R87-R91 R97-R109 R114 = SparkFun-Resistors; PROD_ID: RES-00824
R7 R8 R11 R12 R53 R55 R69 R92-R96 R111 R112 = SparkFun-Resistors; PROD_ID: RES-07856
R13 R14 R85 R86 = SparkFun-Resistors; PROD_ID: RES-07862
R37 R41 R45 R49 R77-R80 = SparkFun-Resistors; PROD_ID: RES-08272
S1-S10 = SparkFun-Switches; PROD_ID: SWCH-08247; SF_SKU: COM-08720
U1 U10 = SparkFun-RF; PROD_ID: IC-13849
U4 U12 = MTAES_V2_UniqueParts; MANUFACTURER_PART_NUMBER: TPS78218DDCR; VENDOR: Texas Instruments
U5 U11 = MTAES_V2_UniqueParts; PROD_ID: IC-13192
U6 U14 = SparkFun-IC-Comms; PROD_ID: IC-12292
U7 U13 = SparkFun-IC-Power; PROD_ID: VREG-12457
U8 U15 = SparkFun-IC-Comms; PROD_ID: IC-14038
U9 U16 = SparkFun-DigitalIC; PROD_ID: IC-13229
U$1-U$8 U$29 U$41-U$45 U$70 U$71 U$74-U$81 U$101-U$107 U$128 U$136-U$140 U$165 U$168-U$175 = buzzard_labels_ALED
U$9-U$28 U$34-U$40 U$46-U$54 U$63 U$64 U$66 U$67 U$69 U$108-U$127 U$129-U$135 U$141-U$149 U$158 U$159 U$161 U$162 U$164 = buzzard_labels_TESTPOINTS
U$30-U$33 U$56-U$62 U$65 U$72 U$73 U$82-U$97 U$151-U$157 U$160 U$166 U$167 U$176-U$195 = buzzard_labels_BUTTONS
U$55 U$68 U$150 U$163 = buzzard_labels_TITLE
U$98 U$196 = MTAES_V2_UniqueParts; DESIGNER: Owen Lyke; REV: v2.0.1
U$99 U$100 U$197 U$198 = buzzard_labels_usbstm_separate

## Nets
1.8V: JP9.3 TP18.P$1 U4.5
1.8V1: JP8.3 TP73.P$1 U12.5
3.3V: C2.1 C3.1 C4.1 C5.1 C6.1 C9.1 C14.1 C16.1 C18.1 C20.1 D1.A D2.4VCC D3.A D4.A D5.A D6.A D8.A D12.A J3.1 JP1.1 JP2.1 JP3.1 JP4.1 JP5.3 JP6.1 JP7.3 JP9.1 M1.P$2 M2.P$2 M21.CD_SW2 M21.P$4 Q2.1 Q3.1 Q4.1 Q5.1 Q6.1 Q7.1 Q8.1 Q9.1 Q10.1 Q12.1 Q14.1 Q16.1 Q18.1 Q19.1 Q20.1 Q21.1 R6.2 R9.2 R17.2 R18.2 R19.2 R21.2 R22.2 R23.2 R24.2 R29.2 R30.2 R31.2 R32.2 R37.2 R39.2 R45.2 R47.2 R57.2 R58.2 R59.2 R60.2 R65.2 R67.2 S3.3 S3.4 S5.3 S5.4 TP51.P$1 U1.2 U3.P$6 U3.P$11 U3.P$20 U3.P$21 U3.P$27 U3.P$50 U3.P$75 U3.P$100 U4.1 U4.3 U5.13 U6.16 U7.5 U8.4 U8.16 U9.8
3.3V1: C25.1 C26.1 C27.1 C30.1 C31.1 C32.1 C35.1 C36.1 C37.1 C38.1 D7.A D9.A D13.A D14.A D15.A D18.4VCC D19.A D20.A J5.1 JP8.1 JP13.1 JP14.1 JP15.1 JP16.1 JP17.3 JP18.3 JP20.1 M12.CD_SW2 M12.P$4 M37.P$2 M38.P$2 Q13.1 Q15.1 Q17.1 Q24.1 Q25.1 Q26.1 Q27.1 Q28.1 Q29.1 Q30.1 Q31.1 Q32.1 Q35.1 Q36.1 Q37.1 Q38.1 R40.2 R44.2 R48.2 R52.2 R56.2 R71.2 R73.2 R75.2 R78.2 R79.2 R82.2 R83.2 R87.2 R88.2 R89.2 R98.2 R99.2 R100.2 R102.2 R104.2 R106.2 R108.2 R109.2 S7.3 S7.4 S8.3 S8.4 TP79.P$1 U2.P$6 U2.P$11 U2.P$20 U2.P$21 U2.P$27 U2.P$50 U2.P$75 U2.P$100 U10.2 U11.13 U12.1 U12.3 U13.5 U14.16 U15.4 U15.16 U16.8
5V: C17.1 D11.C JP1.3 JP2.3 JP3.3 JP4.3 JP5.1 JP7.1 Q23.2 TP50.P$1 U7.1 U7.3
5V1: C34.1 D17.C JP13.3 JP14.3 JP15.3 JP16.3 JP17.1 JP18.1 Q34.2 TP77.P$1 U13.1 U13.3
ALED1_MOSI_VOUT: M3.P$1 M7.P$1 Q6.3 R33.1
ALED1_MOSI_VOUT1: M14.P$1 M31.P$1 Q15.3 R46.1
ALED1_SCLK_VOUT: M3.P$3 M7.P$3 Q2.3 R25.1
ALED1_SCLK_VOUT1: M14.P$3 M31.P$3 Q13.3 R42.1
ALED1_VOUT: JP1.2 R25.2 R33.2 TP38.P$1
ALED1_VOUT1: JP13.2 R42.2 R46.2 TP82.P$1
ALED2_MOSI_VOUT: M4.P$1 M8.P$1 Q7.3 R34.1
ALED2_MOSI_VOUT1: M16.P$1 M32.P$1 Q24.3 R54.1
ALED2_SCLK_VOUT: M4.P$3 M8.P$3 Q3.3 R26.1
ALED2_SCLK_VOUT1: M16.P$3 M32.P$3 Q17.3 R50.1
ALED2_VOUT: JP2.2 R26.2 R34.2 TP39.P$1
ALED2_VOUT1: JP14.2 R50.2 R54.2 TP85.P$1
ALED3_MOSI_VOUT: M5.P$1 M9.P$1 Q8.3 R35.1
ALED3_MOSI_VOUT1: M18.P$1 M33.P$1 Q26.3 R72.1
ALED3_SCLK_VOUT: M5.P$3 M9.P$3 Q4.3 R27.1
ALED3_SCLK_VOUT1: M18.P$3 M33.P$3 Q25.3 R70.1
ALED3_VOUT: JP3.2 R27.2 R35.2 TP40.P$1
ALED3_VOUT1: JP15.2 R70.2 R72.2 TP88.P$1
ALED4_MOSI_VOUT: M6.P$1 M10.P$1 Q9.3 R36.1
ALED4_MOSI_VOUT1: M24.P$1 M34.P$1 Q28.3 R76.1
ALED4_SCLK_VOUT: M6.P$3 M10.P$3 Q5.3 R28.1
ALED4_SCLK_VOUT1: M24.P$3 M34.P$3 Q27.3 R74.1
ALED4_VOUT: JP4.2 R28.2 R36.2 TP41.P$1
ALED4_VOUT1: JP16.2 R74.2 R76.2 TP91.P$1
BOOT0: JP6.2 R38.2 U3.P$94
BOOT1: JP20.2 R114.2 U2.P$94
BRK: Q18.2 R57.1 TP69.P$1 U3.P$81
BRK1: Q35.2 R100.1 TP93.P$1 U2.P$81
BRK_12V: M19.P$1 M20.P$1 Q18.3 R61.1
BRK_12V1: M35.P$1 M36.P$1 Q35.3 R101.1
CS_ESP: TP10.P$1 U1.29 U3.P$4
CS_ESP1: TP28.P$1 U2.P$4 U10.29
CS_IMU: R67.1 TP24.P$1 U3.P$3 U6.20
CS_IMU1: R98.1 TP61.P$1 U2.P$3 U14.20
CS_IMU_VDDIO: TP29.P$1 U5.22 U6.1
CS_IMU_VDDIO1: TP65.P$1 U11.22 U14.1
CS_SD: M21.P$2 R65.1 TP23.P$1 U3.P$2
CS_SD1: M12.P$2 R99.1 TP60.P$1 U2.P$2
ESP_0: Q1.1 R6.1 S1.1 S1.2 U1.25
ESP_1: Q11.1 R108.1 S9.1 S9.2 U10.25
ESP_!DTR: Q1.6 R3.2 TP6.P$1 U8.13
ESP_!DTR1: Q11.6 R2.2 TP16.P$1 U15.13
ESP_!RESET: C1.1 Q1.3 R9.1 S2.1 S2.2 TP13.P$1 U1.3
ESP_!RESET1: C24.1 Q11.3 R109.1 S10.1 S10.2 TP46.P$1 U10.3
ESP_!RTS: Q1.4 R4.2 TP5.P$1 U8.14
ESP_!RTS1: Q11.4 R5.2 TP15.P$1 U15.14
ESP_DRDY: TP1.P$1 U1.24 U3.P$9
ESP_DRDY1: TP104.P$1 U2.P$9 U10.24
ESP_RXI0: R8.1 TP3.P$1 U1.34 U8.2
ESP_RXI1: R112.1 TP2.P$1 U10.34 U15.2
ESP_STAT_MOSI: D2.1DIN TP11.P$1 U1.16
ESP_STAT_MOSI1: D18.1DIN TP32.P$1 U10.16
ESP_STAT_SCLK: D2.2CIN TP12.P$1 U1.13
ESP_STAT_SCLK1: D18.2CIN TP33.P$1 U10.13
ESP_TXO0: R7.1 TP4.P$1 U1.35 U8.3
ESP_TXO1: R111.1 TP14.P$1 U10.35 U15.3
ESP_USB_DM: J1.D- U8.6
ESP_USB_DM1: J6.D- U15.6
ESP_USB_DP: J1.D+ U8.5
ESP_USB_DP1: J6.D+ U15.5
GND: C1.2 C2.2 C3.2 C4.2 C5.2 C6.2 C7.1 C8.1 C9.2 C10.2 C11.2 C12.1 C13.2 C14.2 C15.2 C16.2 C17.2 C18.2 C20.2 D2.3GND D10.A J1.GND J2.GND J3.3 J3.5 J3.9 M3.P$2 M4.P$2 M5.P$2 M6.P$2 M7.P$2 M8.P$2 M9.P$2 M10.P$2 M11.P$4 M13.P$4 M15.P$4 M17.P$4 M21.P$6 M22.P$1 M23.P$2 Q22.1 R1.1 R10.1 R16.1 R20.1 R38.1 R61.2 R62.2 R63.2 R64.2 R66.1 R68.1 R69.1 S1.3 S1.4 S2.3 S2.4 S4.3 S4.4 TP52.P$1 U1.1 U1.15 U1.38 U1.GND U3.P$10 U3.P$19 U3.P$26 U3.P$49 U3.P$74 U3.P$99 U4.2 U4.4 U5.18 U5.20 U6.15 U7.2 U8.1 U9.4 Y1.2 Y1.4
GND1: C19.1 C21.1 C22.2 C23.2 C24.2 C25.2 C26.2 C27.2 C28.2 C29.2 C30.2 C31.2 C32.2 C33.1 C34.2 C35.2 C36.2 C37.2 C38.2 D16.A D18.3GND J4.GND J5.3 J5.5 J5.9 J6.GND M12.P$6 M14.P$2 M16.P$2 M18.P$2 M24.P$2 M25.P$4 M26.P$4 M27.P$2 M28.P$1 M29.P$4 M30.P$4 M31.P$2 M32.P$2 M33.P$2 M34.P$2 Q33.1 R15.1 R90.1 R91.1 R96.1 R97.1 R101.2 R103.2 R105.2 R107.2 R110.1 R113.1 R114.1 S6.3 S6.4 S9.3 S9.4 S10.3 S10.4 TP80.P$1 U2.P$10 U2.P$19 U2.P$26 U2.P$49 U2.P$74 U2.P$99 U10.1 U10.15 U10.38 U10.GND U11.18 U11.20 U12.2 U12.4 U13.2 U14.15 U15.1 U16.4 Y2.2 Y2.4
I2C1_SCL: Q10.2 R37.1 TP54.P$1 U3.P$95
I2C1_SCL1: Q29.2 R78.1 TP98.P$1 U2.P$95
I2C1_SCL_VOUT: M11.P$1 M15.P$1 Q10.3 R41.1
I2C1_SCL_VOUT1: M25.P$1 M29.P$1 Q29.3 R77.1
I2C1_SDA: Q14.2 R45.1 TP53.P$1 U3.P$93
I2C1_SDA1: Q30.2 R79.1 TP97.P$1 U2.P$93
I2C1_SDA_VOUT: M11.P$2 M15.P$2 Q14.3 R49.1
I2C1_SDA_VOUT1: M25.P$2 M29.P$2 Q30.3 R80.1
I2C1_VOUT: JP5.2 M11.P$3 M15.P$3 R41.2 R49.2
I2C1_VOUT1: JP17.2 M25.P$3 M29.P$3 R77.2 R80.2
I2C2_SCL: U3.P$46
I2C2_SCL1: U2.P$46
I2C2_SDA: U3.P$47
I2C2_SDA1: U2.P$47
IMU_FSYNC: TP31.P$1 U3.P$64 U6.12
IMU_FSYNC1: TP67.P$1 U2.P$64 U14.12
IMU_FSYNC_VDDIO: U5.11 U6.9
IMU_FSYNC_VDDIO1: U11.11 U14.9
IMU_INT: TP30.P$1 U3.P$63 U6.11
IMU_INT1: TP66.P$1 U2.P$63 U14.11
IMU_INT_VDDIO: U5.12 U6.10
IMU_INT_VDDIO1: U11.12 U14.10
IMU_RESV1: JP10.1 U5.1
IMU_RESV2: JP12.1 U11.1
IMU_VDDIO: C13.1 JP9.2 JP10.2 TP17.P$1 U5.8 U6.5 U6.6
IMU_VDDIO1: C29.1 JP8.2 JP12.2 TP63.P$1 U11.8 U14.5 U14.6
LTS: Q19.2 R58.1 TP70.P$1 U3.P$82
LTS1: Q36.2 R102.1 TP94.P$1 U2.P$82
LTS_12V: M19.P$2 M20.P$2 Q19.3 R62.1
LTS_12V1: M35.P$2 M36.P$2 Q36.3 R103.1
N$1: C23.1 U2.P$73
N$2: J2.SHIELD J2.SHIELD2 J2.SHIELD3 J2.SHIELD4 J2.SHIELD5 J2.SHIELD6 J2.SHIELD7 J2.SHIELD8 J2.SHIELD9 J2.SHIELD10 R10.2
N$3: C11.1 U3.P$73
N$4: J1.SHIELD J1.SHIELD2 J1.SHIELD3 J1.SHIELD4 J1.SHIELD5 J1.SHIELD6 J1.SHIELD7 J1.SHIELD8 J1.SHIELD9 J1.SHIELD10 R1.2
N$5: C10.1 U3.P$48
N$6: C22.1 U2.P$48
N$7: Q1.5 R3.1
N$8: Q1.2 R4.1
N$9: Q11.5 R2.1
N$10: Q11.2 R5.1
N$11: C28.1 U11.10
N$12: J5.2 R86.1
N$13: C15.1 U5.10
N$14: J5.4 R85.1
N$15: D8.C R55.2
N$16: J3.2 R13.1
N$17: J3.4 R14.1
N$18: D15.C R95.2
N$19: D6.C R53.2
N$20: D1.C R7.2
N$21: D3.C R8.2
N$22: D12.C R69.2
N$23: D14.C R94.2
N$24: D13.C R96.2
N$25: D5.C R12.2
N$26: D4.C R11.2
N$27: D9.C R93.2
N$28: D7.C R92.2
N$29: J6.SHIELD J6.SHIELD2 J6.SHIELD3 J6.SHIELD4 J6.SHIELD5 J6.SHIELD6 J6.SHIELD7 J6.SHIELD8 J6.SHIELD9 J6.SHIELD10 R110.2
N$30: D19.C R111.2
N$31: D20.C R112.2
N$32: J4.SHIELD J4.SHIELD2 J4.SHIELD3 J4.SHIELD4 J4.SHIELD5 J4.SHIELD6 J4.SHIELD7 J4.SHIELD8 J4.SHIELD9 J4.SHIELD10 R113.2
PH0: C7.2 U3.P$12 Y1.3
PH1: C8.2 U3.P$13 Y1.1
PH2: C21.2 U2.P$13 Y2.1
PH3: C19.2 U2.P$12 Y2.3
QSPI_BK1_IO0: Q9.2 R32.1 TP37.P$1 U3.P$58
QSPI_BK1_IO1: U3.P$59
QSPI_BK1_IO2: U3.P$1
QSPI_BK1_IO3: U3.P$60
QSPI_BK1_IO4: U2.P$59
QSPI_BK1_IO5: Q28.2 R75.1 TP90.P$1 U2.P$58
QSPI_BK1_IO6: U2.P$60
QSPI_BK1_IO7: U2.P$1
QSPI_BK1_NCS: U3.P$92
QSPI_BK1_NCS1: U2.P$92
QSPI_BK2_IO0: U3.P$37 U9.5
QSPI_BK2_IO1: U3.P$38 U9.2
QSPI_BK2_IO2: U3.P$39 U9.3
QSPI_BK2_IO3: U3.P$40 U9.7
QSPI_BK2_IO4: U2.P$37 U16.5
QSPI_BK2_IO5: U2.P$38 U16.2
QSPI_BK2_IO6: U2.P$39 U16.3
QSPI_BK2_IO7: U2.P$40 U16.7
QSPI_BK2_NCS: U3.P$79 U9.1
QSPI_BK2_NCS1: U2.P$79 U16.1
QSPI_SCLK: Q5.2 R24.1 TP45.P$1 U3.P$36 U9.6
QSPI_SCLK1: Q27.2 R73.1 TP92.P$1 U2.P$36 U16.6
REV: Q21.2 R60.1 TP72.P$1 U3.P$84
REV1: Q38.2 R106.1 TP96.P$1 U2.P$84
REV_12V: M19.P$4 M20.P$4 Q21.3 R64.1
REV_12V1: M35.P$4 M36.P$4 Q38.3 R107.1
RTS: Q20.2 R59.1 TP71.P$1 U3.P$83
RTS1: Q37.2 R104.1 TP95.P$1 U2.P$83
RTS_12V: M19.P$3 M20.P$3 Q20.3 R63.1
RTS_12V1: M35.P$3 M36.P$3 Q37.3 R105.1
SD_CD: M21.CD_SW1 R66.2 TP25.P$1 U3.P$15
SD_CD1: M12.CD_SW1 R15.2 TP64.P$1 U2.P$15
SPI1_MISO: M21.P$7 TP21.P$1 U3.P$30 U6.13
SPI1_MISO1: M12.P$7 TP56.P$1 U2.P$30 U14.13
SPI1_MISO_VDDIO: U5.9 U6.8
SPI1_MISO_VDDIO1: U11.9 U14.8
SPI1_MOSI: M21.P$3 TP20.P$1 U3.P$88 U6.18
SPI1_MOSI1: M12.P$3 TP55.P$1 U2.P$88 U14.18
SPI1_MOSI_VDDIO: U5.24 U6.3
SPI1_MOSI_VDDIO1: U11.24 U14.3
SPI1_SCLK: M21.P$5 TP22.P$1 U3.P$89 U6.19
SPI1_SCLK1: M12.P$5 TP59.P$1 U2.P$89 U14.19
SPI1_SCLK_VDDIO: U5.23 U6.2
SPI1_SCLK_VDDIO1: U11.23 U14.2
SPI2_MOSI: Q6.2 R29.1 TP34.P$1 U3.P$16
SPI2_MOSI1: Q15.2 R44.1 TP81.P$1 U2.P$16
SPI2_SCLK: Q2.2 R21.1 TP42.P$1 U3.P$52
SPI2_SCLK1: Q13.2 R40.1 TP83.P$1 U2.P$52
SPI3_MOSI: Q7.2 R30.1 TP35.P$1 U3.P$87
SPI3_MOSI1: Q24.2 R52.1 TP84.P$1 U2.P$87
SPI3_SCLK: Q3.2 R22.1 TP43.P$1 U3.P$78
SPI3_SCLK1: Q17.2 R48.1 TP86.P$1 U2.P$78
SPI4_MOSI: Q8.2 R31.1 TP36.P$1 U3.P$5
SPI4_MOSI1: Q26.2 R71.1 TP87.P$1 U2.P$5
SPI4_SCLK: Q4.2 R23.1 TP44.P$1 U3.P$42
SPI4_SCLK1: Q25.2 R56.1 TP89.P$1 U2.P$42
SPI6_MISO: TP8.P$1 U1.31 U3.P$90
SPI6_MISO1: TP26.P$1 U2.P$90 U10.31
SPI6_MOSI: TP7.P$1 U1.37 U3.P$31
SPI6_MOSI1: TP19.P$1 U2.P$31 U10.37
SPI6_SCLK: TP9.P$1 U1.30 U3.P$29
SPI6_SCLK1: TP27.P$1 U2.P$29 U10.30
STM_!RESET: C12.2 J3.10 R19.1 S4.1 S4.2 TP62.P$1 U3.P$14
STM_!RESET1: C33.2 J5.10 R89.1 S6.1 S6.2 TP101.P$1 U2.P$14
STM_USB_DM: J2.D- U3.P$70
STM_USB_DM1: J4.D- U2.P$70
STM_USB_DP: J2.D+ U3.P$71
STM_USB_DP1: J4.D+ U2.P$71
SWCLK: R14.2 R17.1 TP68.P$1 U3.P$76
SWCLK1: R85.2 R87.1 TP102.P$1 U2.P$76
SWDIO: R13.2 R18.1 TP78.P$1 U3.P$72
SWDIO1: R86.2 R88.1 TP103.P$1 U2.P$72
UART4_RX: U1.28 U3.P$23
UART4_RX1: U2.P$23 U10.28
UART4_TX: U1.27 U3.P$22
UART4_TX1: U2.P$22 U10.27
UART5_RX: U3.P$51
UART5_RX1: U2.P$51
UART5_TX: U3.P$80
UART5_TX1: U2.P$80
UART8_RX: U3.P$97
UART8_RX1: U2.P$97
UART8_TX: U3.P$98
UART8_TX1: U2.P$98
ULED1: R11.1 U3.P$7
ULED2: R12.1 U3.P$8
ULED3: R93.1 U2.P$8
ULED4: R92.1 U2.P$7
US1: M1.P$3 M2.P$3 R20.2 S5.1 S5.2 U3.P$85
US2: M1.P$1 M2.P$1 R16.2 S3.1 S3.2 U3.P$86
US3: M37.P$1 M38.P$1 R90.2 S7.1 S7.2 U2.P$86
US4: M37.P$3 M38.P$3 R91.2 S8.1 S8.2 U2.P$85
USART1_RX: Q16.2 R47.1 R55.1 TP58.P$1 U3.P$54
USART1_RX1: Q32.2 R83.1 R95.1 TP100.P$1 U2.P$54
USART1_RX_VOUT: M13.P$1 M17.P$1 Q16.3 R51.1
USART1_RX_VOUT1: M26.P$1 M30.P$1 Q32.3 R84.1
USART1_TX: Q12.2 R39.1 R53.1 TP57.P$1 U3.P$53
USART1_TX1: Q31.2 R82.1 R94.1 TP99.P$1 U2.P$53
USART1_TX_VOUT: M13.P$2 M17.P$2 Q12.3 R43.1
USART1_TX_VOUT1: M26.P$2 M30.P$2 Q31.3 R81.1
USART1_VOUT: JP7.2 M13.P$3 M17.P$3 R43.2 R51.2
USART1_VOUT1: JP18.2 M26.P$3 M30.P$3 R81.2 R84.2
USB_OTG_FS_ID: J2.ID U3.P$69
USB_OTG_FS_ID1: J4.ID U2.P$69
USB_OTG_FS_SOF: U3.P$67
USB_OTG_FS_SOF1: U2.P$67
V_USB: D11.A J1.VBUS J2.VBUS Q23.1 R68.2 TP49.P$1 U3.P$68
V_USB1: D17.A J4.VBUS J6.VBUS Q34.1 R97.2 TP76.P$1 U2.P$68
VOVP: D10.C F1.2 JP11.2 Q23.3 TP48.P$1
VOVP1: D16.C F2.2 JP19.2 Q34.3 TP75.P$1
VRAW: M22.P$2 M23.P$3 Q22.3
VRAW1: M27.P$3 M28.P$2 Q33.3
VRPP: F1.1 JP11.1 Q22.2 TP47.P$1
VRPP1: F2.1 JP19.1 Q33.2 TP74.P$1

## Tracks (layer width: path | path; a pad name or v marks a point on that pad's centre or on a via)
1.8V  (via drill 0.38)
  Top 0.508: U4.5 74.12,37.13 v74.04,37.06
  Bottom 0.508: v74.04,37.06 JP9.3 76.07,37.06 TP18.P$1
1.8V1  (via drill 0.38)
  Top 0.508: U12.5 74.12,93.52 v74.04,93.45
  Bottom 0.508: v74.04,93.45 JP8.3 76.07,93.45 TP73.P$1
3.3V  (via drill 0.38)
  Top 0.203: U5.13 81.9,43.14 82.21,43.45 v82.21,43.66 | U3.P$100 50.93,39.49 50.93,40.39 50.6,40.72 C6.1 49.07,40.72 48.9,40.89 48.9,43.05 48.49,43.46 JP6.1 47.5,44.2 45.09,41.78 45.09,39.75 43.94,38.61 | U6.16 75.59,40.92 75.82,41.15 v75.82,43.43 | U3.P$27 40.13,27.98 40.13,28.68 38.99,29.82 C9.1 | 43.94,38.61 43.05,37.72 43.05,36.23 U3.P$11 | U3.P$50 47.12,18.7 v47.12,13.21 | D2.4VCC 72.96,31.31 72.9,31.37 | U3.P$75 59.3,27.05 v59.69,27.05 | U3.P$20 40.27,32.64 39.88,32.64 | 39.88,32.64 37.15,32.64 | U3.P$21 39.88,32.33 39.88,32.64 | U3.P$6 45.22,37.59 44.96,37.59 43.94,38.61